# Altium PCB PCB2.PcbDoc
Units mm, origin at the board's own origin, x right, y up, seen from the top; angles counter-clockwise.
Board outline 59.94 x 60.07 mm, 4 copper layers (Top Layer, GND, VCC, Bottom Layer), stack 0.603 mm thick; 60 components, 43 nets, 219 pads, 72 vias.
Unrouted connection lines stored in the file: 1.
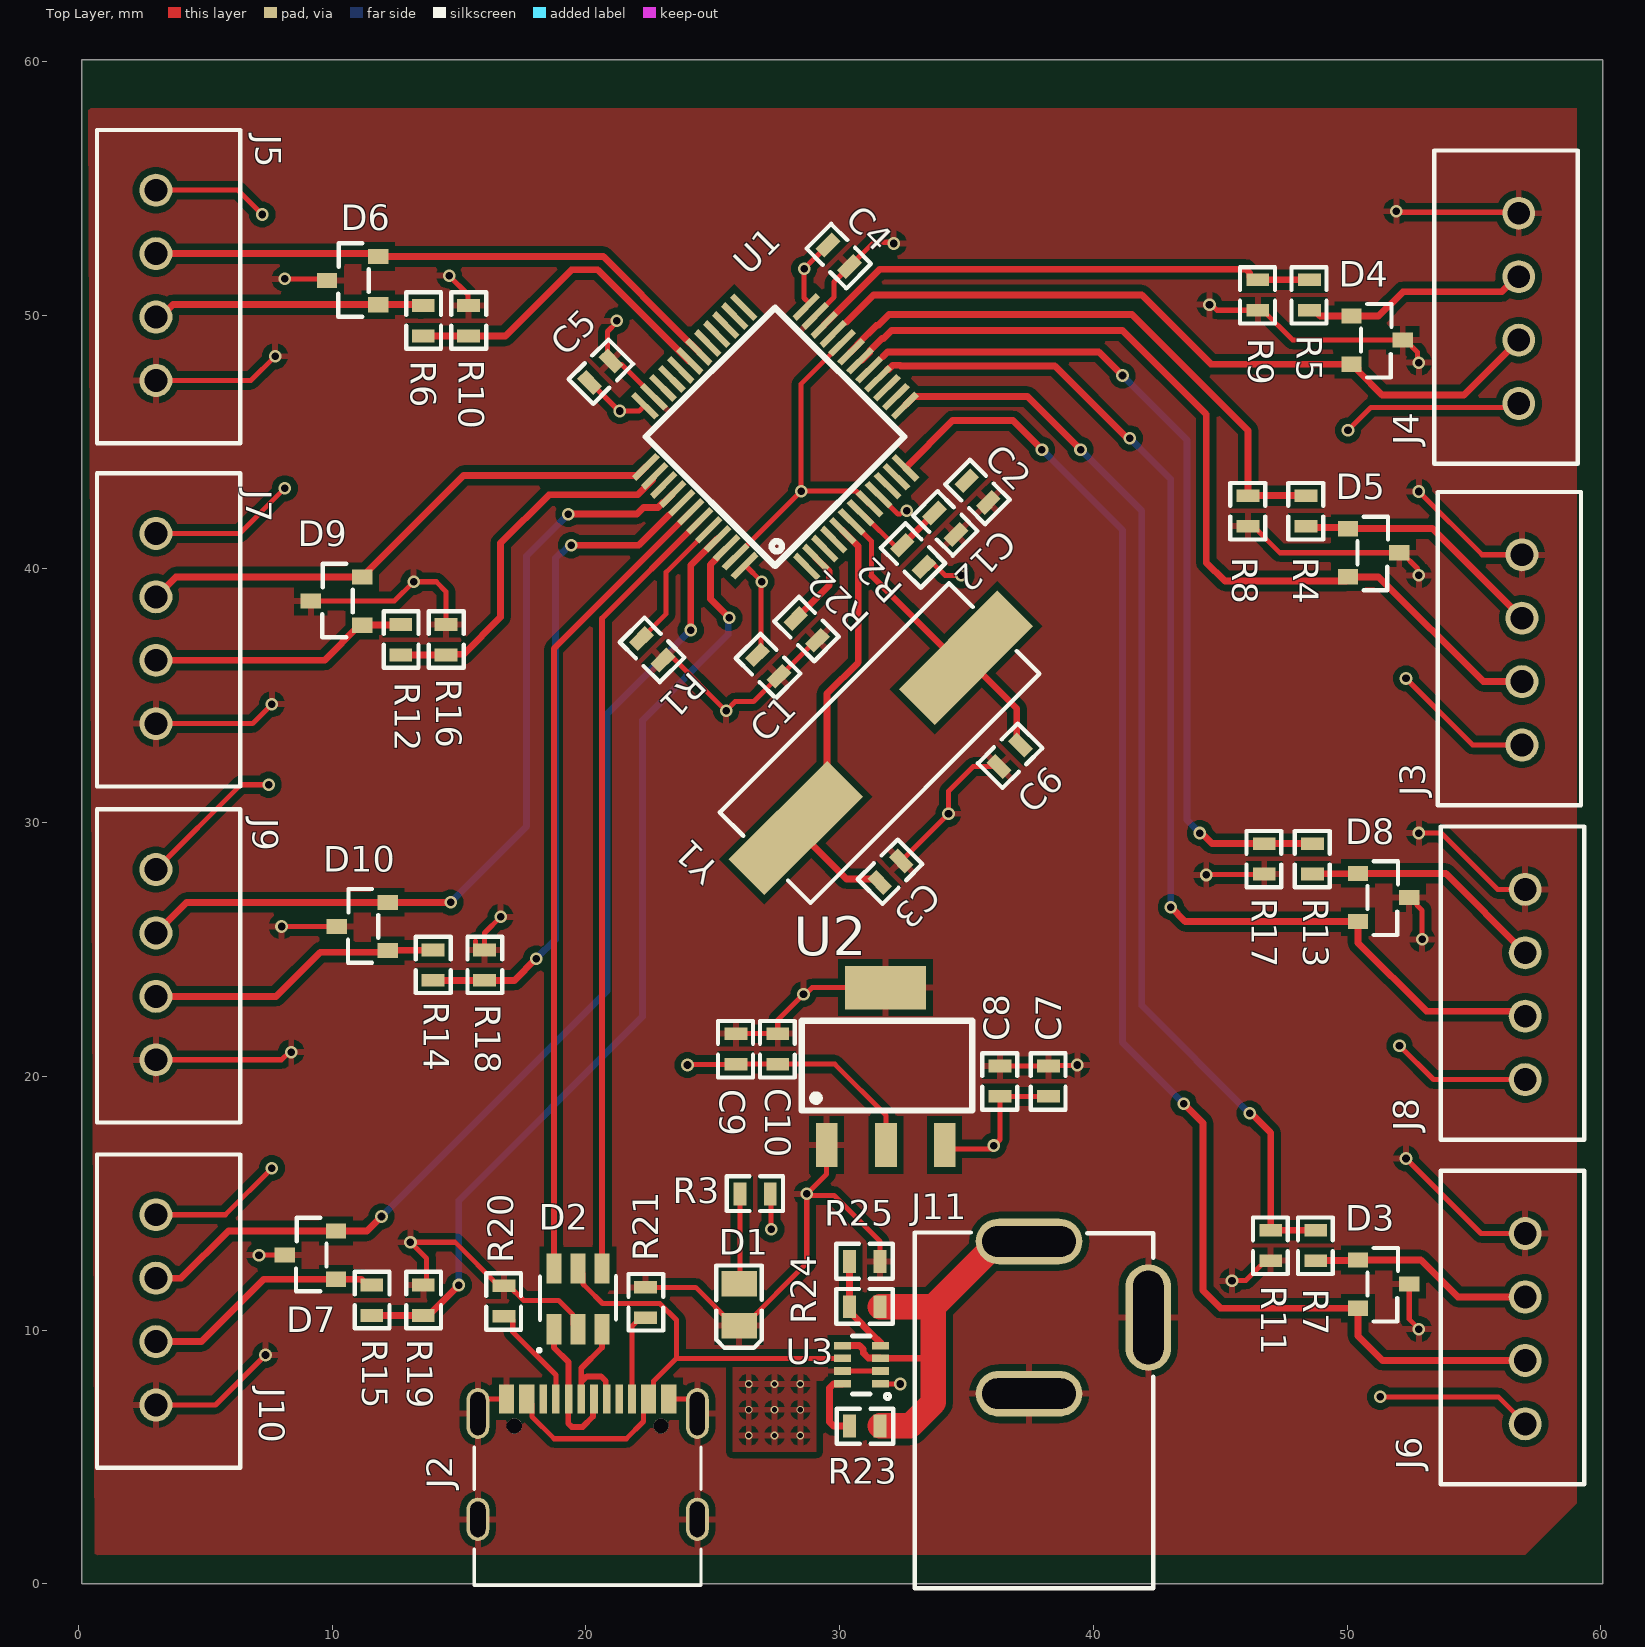
[diagram p0: Top Layer view]
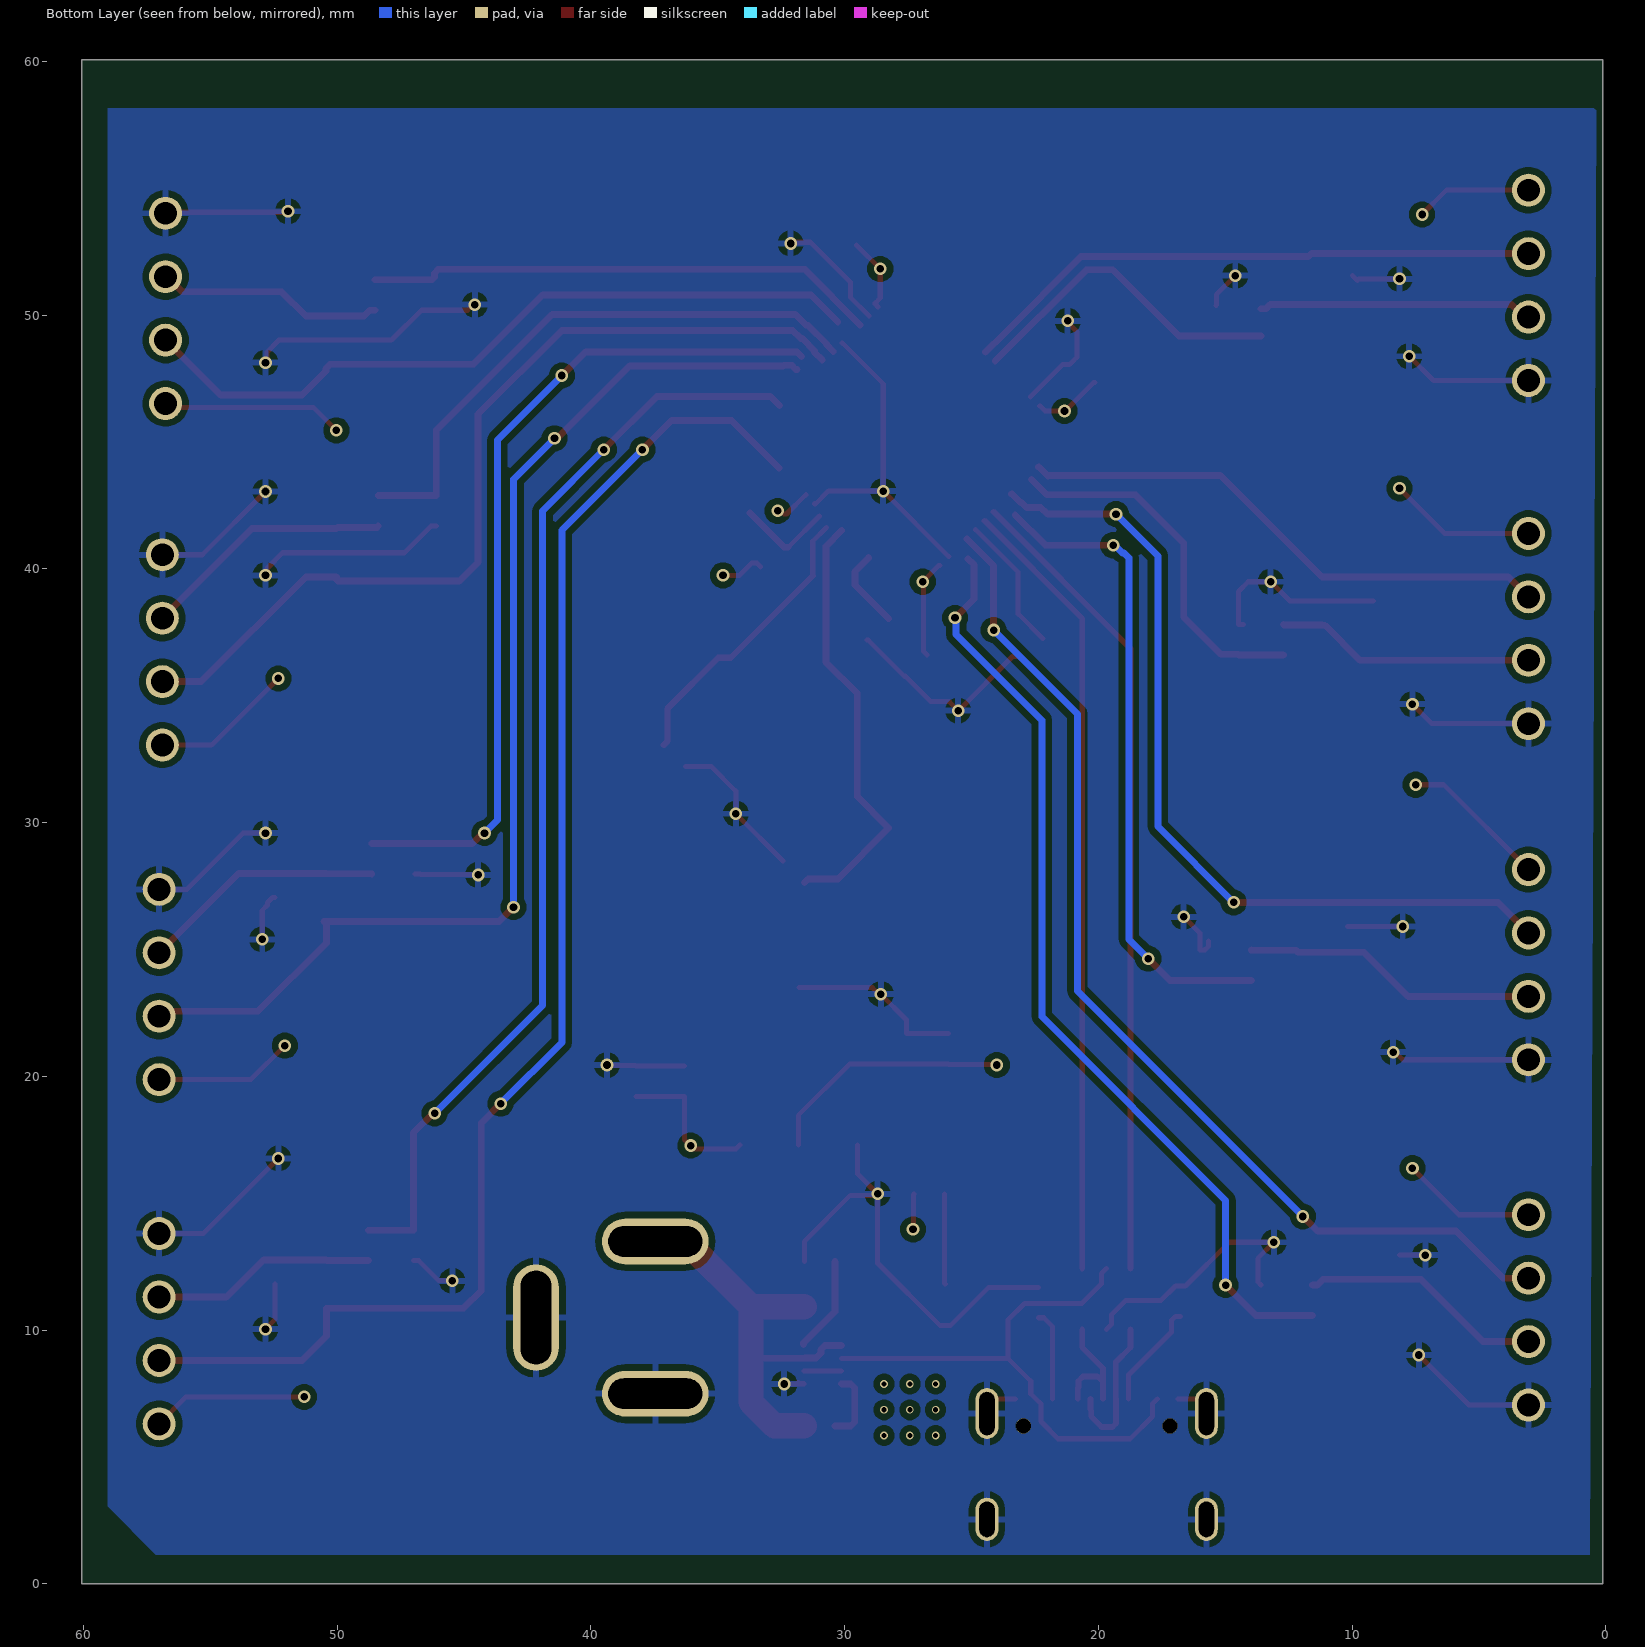
[diagram p1: Bottom Layer view, seen from below]
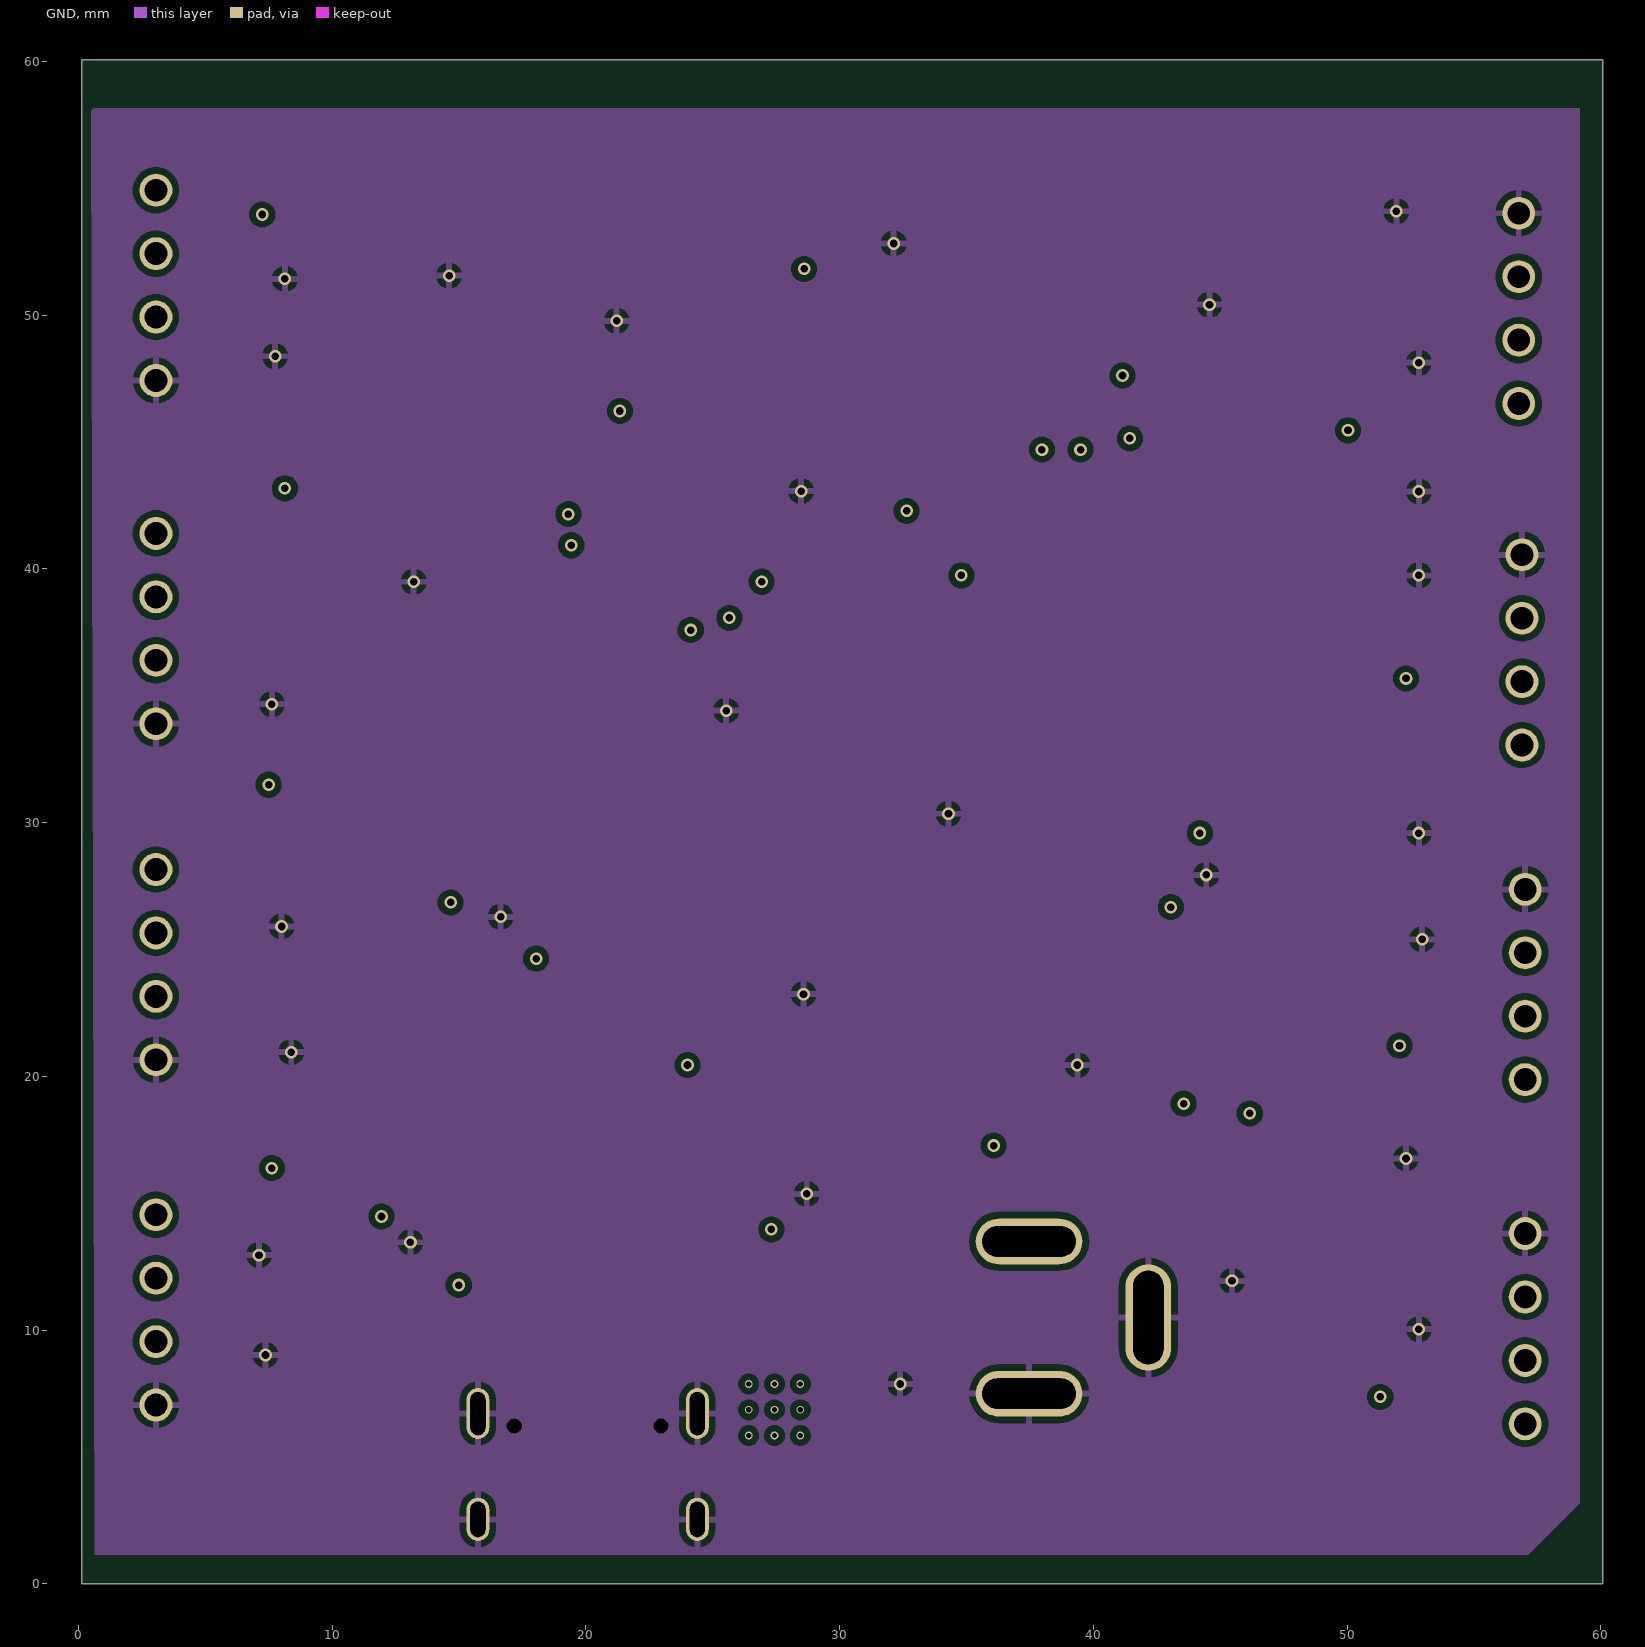
[diagram p2: GND]
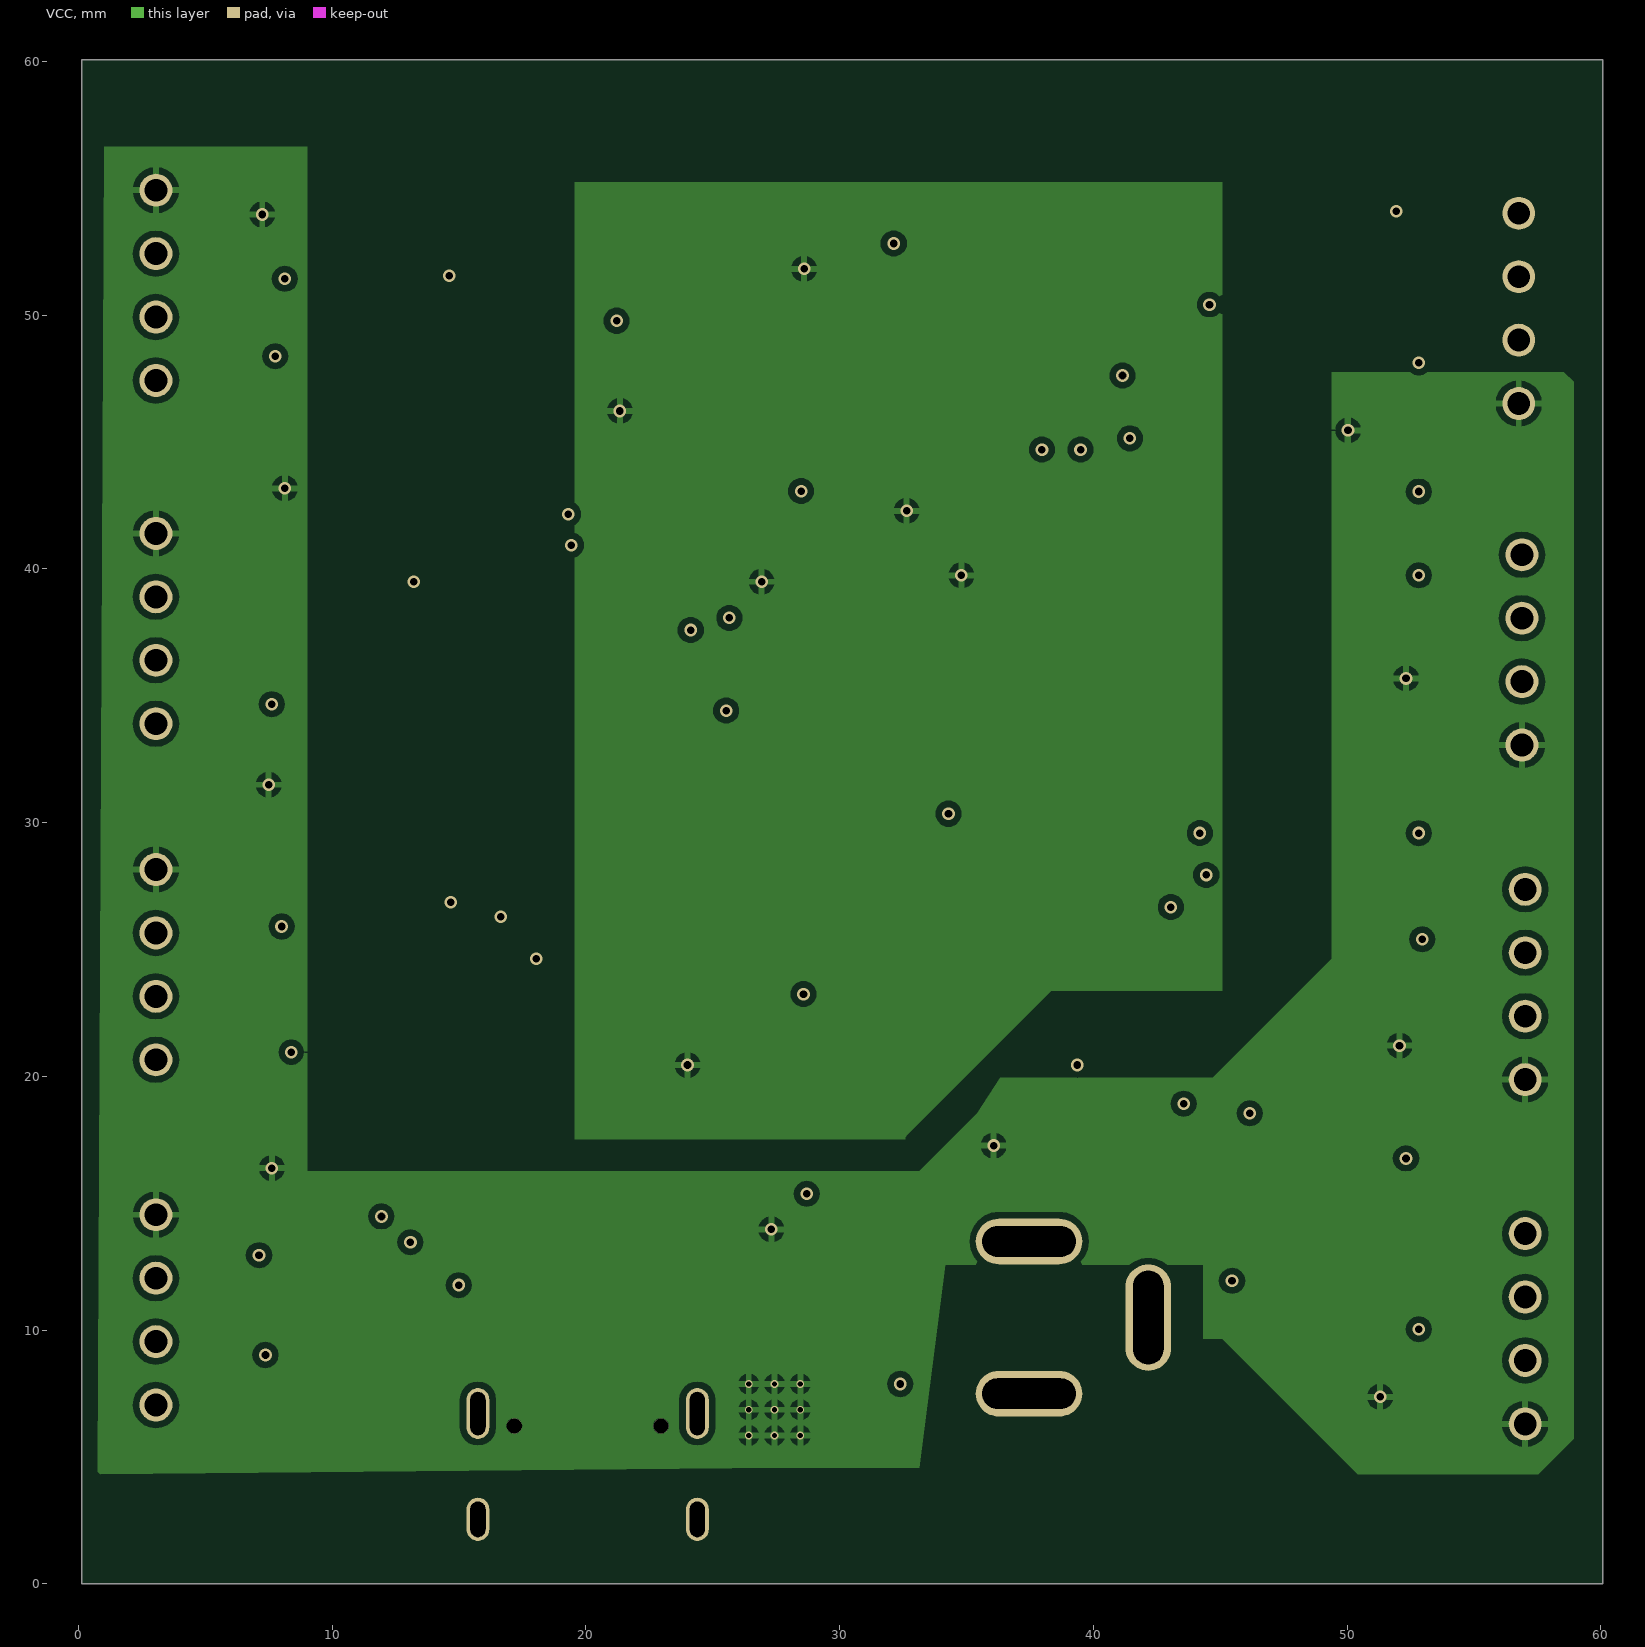
[diagram p3: VCC]
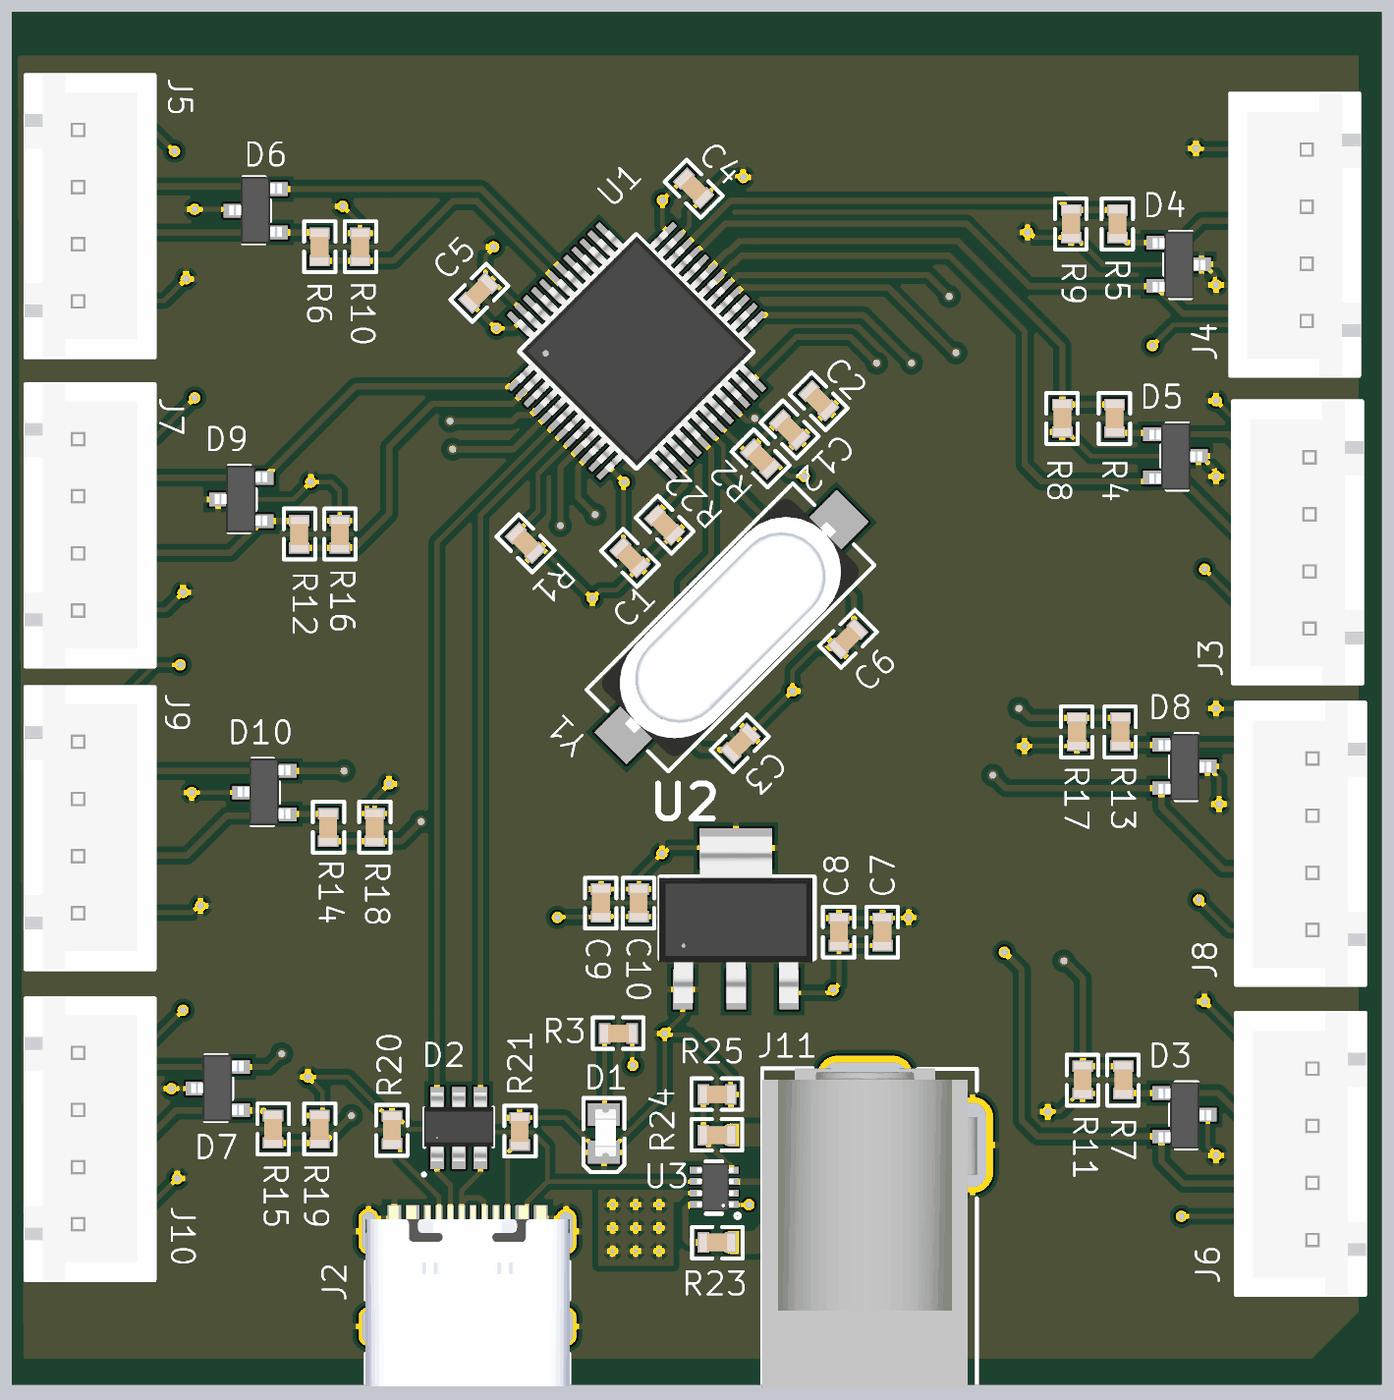
[diagram p4: 3D render of the assembled board from above, using the file's embedded part models]

## Layer stack, top to bottom
Top Solder: solder mask 0.0102, Solder Resist, Dk 3.5
Top Layer: signal copper 0.0356
Dielectric 2: prepreg 0.0711, PP-006, Dk 4.1
GND: signal copper 0.035
Dielectric 1: dielectric 0.32, FR-4, Dk 4.8
VCC: signal copper 0.035
Dielectric 3: prepreg 0.0711, PP-006, Dk 4.1
Bottom Layer: signal copper 0.0356
Bottom Solder: solder mask 0.0102, Solder Resist, Dk 3.5

## Board outline
0.127,0 60.071,0 60.071,60.071 0.127,60.071

## Design rules (kind name [scope] priority, off if disabled: settings)
Clearance [All] p1: gap=0.254 ignorepadtopadclearanceinfootprint=FALSE except(0: Arc-Hole Track-Hole SMDPad-Hole THPad-Hole Via-Hole Fill-Hole Poly-Hole Region-Hole Text-Hole; 0.127: Arc-THPad Track-THPad SMDPad-SMDPad SMDPad-THPad; 0.15: SMDPad-Text THPad-Text Via-Text; 0.2: Arc-SMDPad Track-SMDPad)
DiffPairsRouting [All] p1: maxlimit=0.254 minlimit=0.254 mostfreqgap=0.254 toplayer_minwidth=0.1 toplayer_maxwidth=1 toplayer_prefwidth=0.2 midlayer1_minwidth=0.1 midlayer1_maxwidth=1 midlayer1_prefwidth=0.2 midlayer2_minwidth=0.1 midlayer2_maxwidth=1 midlayer2_prefwidth=0.2 bottomlayer_minwidth=0.1 bottomlayer_maxwidth=1 bottomlayer_prefwidth=0.2 maxuncoupledlength=12.7
PolygonConnect [All] p1: connectstyle=Relief reliefconductorwidth=0.254 reliefentries=4 polygonreliefangle="90 Angle" airgapwidth=0.254
RoutingVias [All] p1: holewidth=0.3 width=0.5 viastyle="Through Hole" minholewidth=0.2 minwidth=0.3 maxholewidth=0.8 maxwidth=1
SolderMaskExpansion [All] p1: expansion=0.102 istentingtop=FALSE
Width [All] p1: maxlimit=2 minlimit=0.1 preferedwidth=0.3
29 further rules are at their usual default settings.

## Classes and differential pairs
differential pair VD: +VD_P -VD_N
differential pair D: +D_P -D_N

## Components (designator, comment, footprint, x,y, rotation, side; value= is the part's Value field where it differs from the comment)
C1 "0.1uF" "0603 cap" 27.178,36.195 r315 top
C2 "100nF capacitor" "0603 cap" 35.433,43.053 r315 top
C3 "22pF" "0603 cap" 32.004,28.067 r225 top
C4 "100nF capacitor" "0603 cap" 29.965,52.349 r315 top
C5 "100nF capacitor" "0603 cap" 20.567,47.777 r45 top
C6 "22pF" "0603 cap" 36.703,32.639 r45 top
C7 "10uF" "0603 cap" 38.227,19.812 r270 top
C8 "0.1uF" "0603 cap" 36.322,19.812 r270 top
C9 "10uF" "0603 cap" 25.908,21.082 r270 top
C10 "0.1uF" "0603 cap" 27.559,21.082 r270 top
C12 "0.1uF" "0603 cap" 34.163,41.783 r135 top
D1 "Led green" 0805led 26.035,10.922 r90 top
D2 "USBLC6-2SC6" SOP23-6l 19.685,11.176 r90 top
D3 "PSM712-ES" sop23 50.431,11.811 r270 top
D4 "PSM712-ES" sop23 50.177,49.022 r270 top
D5 "PSM712-ES" sop23 50.038,40.64 r270 top
D6 "PSM712-ES" sop23 11.811,51.369 r90 top
D7 "PSM712-ES" sop23 10.148,12.954 r90 top
D8 "PSM712-ES" sop23 50.431,27.051 r270 top
D9 "PSM712-ES" sop23 11.176,38.735 r90 top
D10 "PSM712-ES" sop23 12.192,25.908 r90 top
J2 "USB-C" USB-C 20.066,2.54 r0 top
J3 "Pin header" "jst 4 pin" 56.896,36.81 r90 top
J4 "Pin header" "jst 4 pin" 56.769,50.272 r90 top
J5 "Pin header" "jst 4 pin" 3.048,51.181 r270 top
J6 "Pin header" "jst 4 pin" 57.023,10.053 r90 top
J7 "Pin header" "jst 4 pin" 3.048,37.652 r270 top
J8 "Pin header" "jst 4 pin" 57.023,23.622 r90 top
J9 "Pin header" "jst 4 pin" 3.048,24.404 r270 top
J10 "Pin header" "jst 4 pin" 3.048,10.795 r270 top
J11 "DC jack" "DC jack" 39.816,10.493 r90 top
R1 "4k7" "0603 cap" 22.606,36.83 r315 top
R2 "4k7" "0603 cap" 32.893,40.513 r135 top
R3 "330R" "0603 cap" 26.67,15.367 r180 top
R4 "1k" "0603 cap" 48.387,42.291 r270 top
R5 "1k" "0603 cap" 48.514,50.8 r270 top
R6 "1k" "0603 cap" 13.589,49.784 r90 top
R7 "1k" "0603 cap" 48.768,13.335 r270 top
R8 "2k" "0603 cap" 46.101,42.291 r270 top
R9 "2k" "0603 cap" 46.482,50.8 r270 top
R10 "2k" "0603 cap" 15.367,49.784 r90 top
R11 "2k" "0603 cap" 46.99,13.335 r270 top
R12 "1k" "0603 cap" 12.7,37.211 r90 top
R13 "1k" "0603 cap" 48.641,28.575 r270 top
R14 "1k" "0603 cap" 13.97,24.384 r90 top
R15 "1k" "0603 cap" 11.557,11.176 r90 top
R16 "2k" "0603 cap" 14.478,37.211 r90 top
R17 "2k" "0603 cap" 46.736,28.575 r270 top
R18 "2k" "0603 cap" 16.002,24.384 r90 top
R19 "2k" "0603 cap" 13.589,11.176 r90 top
R20 "5k" "0603 cap" 16.764,11.141 r270 top
R21 "5k" "0603 cap" 22.352,11.084 r90 top
R22 "4k7" "0603 cap" 28.695,37.617 r135 top
R23 "1k" "0603 cap" 30.988,6.223 r0 top
R24 "1k" "0603 cap" 30.988,10.922 r180 top
R25 "1k" "0603 cap" 30.988,12.7 r180 top
U1 "UART" UART 27.806,44.856 r45 top
U2 "Linear Voltage Regulator" "linear voltage regulato" 31.877,23.495 r270 top
U3 "TPS2116DRLR" SOP8 30.861,8.636 r180 top
Y1 "8mhz" crystal 31.623,33.147 r225 top

## Footprints (in the part's own frame and the unit in brackets; to place one, negate y for a bottom-side part, rotate by r counter-clockwise, add the part's x,y. Pads: shape width x height; smd on the part's side, far side on the other; paste and mask are expansions set on the pad)
"0603 cap" [mm]
  rect 0.5x0.9 smd: 1(-0.6,0) 2(0.6,0)
  silkscreen extent -1.1,-0.7 1.13,0.68, body extent -0.8,-0.4 0.8,0.4, height 0.8
0805led [mm]
  rect 1x1.4 smd: 1(0.9,0) 2(-0.75,0)
  silkscreen extent -1.63,-0.9 1.63,0.9, body extent -0.93,-0.53 1.13,0.38, height 0.85
crystal [mm]
  rect 5.5x2 smd: 1(-4.75,0) 2(4.75,0)
  silkscreen extent -6.35,-2.55 6.43,2.5, body extent -6.2,-2.43 6.3,2.37, height 4.02
"DC jack" [mm]
  oval 1.801x4.201 hole 1.199 slot 3.701 at 90 deg: 1(-3,2.351) 2(3,2.351)
  oval 4.201x1.801 hole 1.199 slot 3.701 at 0 deg: 3(0,-2.351)
  silkscreen extent -10.67,-2.54 3.35,6.86, body extent -10.66,-2.54 3.34,6.86, height 11.09
"jst 4 pin" [mm]
  round 1.3 hole 0.9: 1(-3.75,0) 2(-1.25,0) 3(1.25,0) 4(3.75,0)
  silkscreen extent -6.12,-2.32 6.23,3.32, body extent -6.17,-2.38 6.23,3.37, height 2.95
"linear voltage regulato" [mm]
  rect 1.72x3.2 smd: 1(0,-0.07)
  rect 1.75x0.85 smd: 1(6.2,-2.39) 2(6.2,-0.05) 3(6.2,2.26)
  silkscreen extent 1.3,-3.37 4.84,3.35, body extent -0.49,-3.41 6.81,3.29, height 1.91
SOP8 [mm]
  rect 0.67x0.3 smd mask+0.06: 1(-0.74,0.75) 2(-0.74,0.25) 3(-0.74,-0.25) 4(-0.74,-0.75) 5(0.74,-0.75) 6(0.74,-0.25) 7(0.74,0.25) 8(0.74,0.75)
  silkscreen extent -1.13,-1.13 0.35,1.35, body extent -0.85,-1.05 0.75,1.05, height 0.6
sop23 [mm]
  rect 0.6x0.8 smd: 1(-0.95,0) 2(0.95,0) 3(0,2.02)
  silkscreen extent -1.43,0.38 1.48,1.58, body extent -1.43,-0.13 1.49,2.17, height 1.21
SOP23-6l [mm]
  rect 1.2x0.6 smd: 1(-1.15,0.95) 2(-1.15,0) 3(-1.15,-0.95) 4(1.25,-0.95) 5(1.25,0) 6(1.25,0.95)
  silkscreen extent -2.03,-1.5 0.95,1.58, body extent -1.4,-1.52 1.6,1.52, height 1.45
UART [mm]
  rect 0.25x1.31 smd: 1(-2.73,-4) 2(-2.23,-4) 3(-1.73,-4) 4(-1.23,-4) 5(-0.73,-4) 6(-0.23,-4) 7(0.27,-4) 8(0.77,-4) 9(1.27,-4) 10(1.77,-4) 11(2.27,-4) 12(2.77,-4) 25(2.74,4.99) 26(2.24,4.99) 27(1.74,4.99) 28(1.24,4.99) 29(0.74,4.99) 30(0.24,4.99) 31(-0.26,4.99) 32(-0.76,4.99) 33(-1.26,4.99) 34(-1.76,4.99) 35(-2.26,4.99) 36(-2.76,4.99)
  rect 1.31x0.25 smd: 13(4.49,-2.25) 14(4.49,-1.75) 15(4.49,-1.25) 16(4.49,-0.75) 17(4.49,-0.25) 18(4.49,0.25) 19(4.49,0.75) 20(4.49,1.25) 21(4.49,1.75) 22(4.49,2.25) 23(4.49,2.75) 24(4.49,3.25) 37(-4.44,3.26) 38(-4.44,2.76) 39(-4.44,2.26) 40(-4.44,1.76) 41(-4.44,1.26) 42(-4.44,0.76) 43(-4.44,0.26) 44(-4.44,-0.24) 45(-4.44,-0.74) 46(-4.44,-1.24) 47(-4.44,-1.74) 48(-4.44,-2.24)
  silkscreen extent -3.6,-3.1 3.6,4.1, body extent -4.57,-4.1 4.63,5.1, height 1.2
USB-C [mm]
  rect 0.6x1.14 smd mask+0.05: A1/B12(-3.2,4.75) A4/B9(-2.4,4.75) B1/A12(3.2,4.75) B4/A9(2.4,4.75)
  rect 0.3x1.14 smd mask+0.05: A5(-1.25,4.75) A6(-0.25,4.75) A7(0.25,4.75) A8(1.25,4.75) B5(1.75,4.75) B6(0.75,4.75) B7(-0.75,4.75) B8(-1.75,4.75)
  oval 0.9x2 hole 0.6 slot 1.7 at 90 deg: S1(-4.325,4.17) S2(4.325,4.17)
  oval 0.9x1.7 hole 0.6 slot 1.4 at 90 deg: S3(-4.325,0) S4(4.325,0)
  round 0.6 hole 0.6 unplated: ""(-2.89,3.68) ""(2.89,3.68)
  silkscreen extent -4.47,-2.6 4.47,2.85, body extent -4.47,-2.6 4.47,5.31, height 3.31

## Part data
C1 C8 C10 C12: library part "100nF capacitor", "50V 100nF X7R ±10% 0603 Multilayer Ceramic Capacitors MLCC - SMD/SMT ROHS", LCSC Part #=C235731, Manufacturer="PSA(Prosperity Dielectrics)", Mfr. Part #=FN18X104K500PBG, supplier=LCSC
C2 C4 C5: "50V 100nF X7R ±10% 0603 Multilayer Ceramic Capacitors MLCC - SMD/SMT ROHS", LCSC Part #=C235731, Manufacturer="PSA(Prosperity Dielectrics)", Mfr. Part #=FN18X104K500PBG, supplier=LCSC
C3 C6: library part "22pF capacitor", "50V 22pF C0G ±5% 0603 Multilayer Ceramic Capacitors MLCC - SMD/SMT ROHS", LCSC Part #=C525244, Manufacturer="PSA(Prosperity Dielectrics)", Mfr. Part #=FN18N220J500PSG, supplier=LCSC
C7 C9: library part "10uF capacitor", "6.3V 10uF ±10% 0603 Multilayer Ceramic Capacitors MLCC - SMD/SMT ROHS", LCSC Part #=C2836875, Manufacturer="PSA(Prosperity Dielectrics)", Mfr. Part #=FS18B106K6R3PBG, supplier=LCSC
D1: "Emerald 0805 Light Emitting Diodes (LED) ROHS", LCSC Part #=C434432, Manufacturer="Yongyu Photoelectric", Mfr. Part #=SZYY0805G, supplier=LCSC
D2: "5A 17V 6V Unidirectional 5.25V SOT-23-6 Electrostatic and Surge Protection (TVS/ESD) ROHS", LCSC Part #=C7519, Manufacturer=STMicroelectronics, Mfr. Part #=USBLC6-2SC6, supplier=LCSC
D3 D4 D5 D6 D7 D8 D9 D10: "17A 350W Bi-Directional SOT-23 Electrostatic and Surge Protection (TVS/ESD) ROHS", LCSC Part #=C5180294, Manufacturer=ElecSuper, Mfr. Part #=PSM712-ES, supplier=LCSC
J2: "5A 1 16P Female Type-C SMD USB Connectors ROHS", LCSC Part #=C165948, Manufacturer="Korean Hroparts Elec", Mfr. Part #=TYPE-C-31-M-12, supplier=LCSC
J3 J4 J5 J6 J7 J8 J9 J10: "1x4P 4P XH 1 2.5mm 4 Phosphor bronze Plugin,P=2.5mm Wire To Board Connector ROHS", LCSC Part #=C37815, Manufacturer=BOOMELE, Mfr. Part #=XH-4A, supplier=LCSC
J11: "Panel Mounting DC Power Receptacle 260℃ Brass -20℃~+70℃ 2mm 6.2mm 2.5A 24V Plugin DC Power Connector ROHS", LCSC Part #=C319099, Manufacturer="XKB Connection", Mfr. Part #=DC-005-2.5A-2.0, supplier=LCSC
R1 R2 R22: library part "4k7 resistor", "100mW Thick Film Resistors 75V ±100ppm/℃ ±5% 4.7kΩ 0603 Chip Resistor - Surface Mount ROHS", LCSC Part #=C25999, Manufacturer="UNI-ROYAL(Uniroyal Elec)", Mfr. Part #=0603WAJ0472T5E, supplier=LCSC
R3: "100mW Thick Film Resistors 75V ±100ppm/℃ ±1% 330Ω 0603 Chip Resistor - Surface Mount ROHS", LCSC Part #=C23138, Manufacturer="UNI-ROYAL(Uniroyal Elec)", Mfr. Part #=0603WAF3300T5E, supplier=LCSC
R4 R5 R6 R7 R12 R13 R14 R15 R23 R24 R25: library part "1k resistor", "100mW Thick Film Resistors 75V ±100ppm/℃ ±1% 1kΩ 0603 Chip Resistor - Surface Mount ROHS", LCSC Part #=C21190, Manufacturer="UNI-ROYAL(Uniroyal Elec)", Mfr. Part #=0603WAF1001T5E, supplier=LCSC
R8 R9 R10 R11 R16 R17 R18 R19: library part "2k resistor", "100mW Thick Film Resistors 75V ±100ppm/℃ ±1% 2kΩ 0603 Chip Resistor - Surface Mount ROHS", LCSC Part #=C22975, Manufacturer="UNI-ROYAL(Uniroyal Elec)", Mfr. Part #=0603WAF2001T5E, supplier=LCSC
R20 R21: "100mW Thick Film Resistors 75V ±100ppm/℃ ±1% 330Ω 0603 Chip Resistor - Surface Mount ROHS", LCSC Part #=C23186, Manufacturer="UNI-ROYAL(Uniroyal Elec)", Mfr. Part #=0603WAF5101T5E, supplier=LCSC
U1: "LQFP-48(7x7) USB ICs ROHS", Manufacturer="WCH(Jiangsu Qin Heng)", Manufacturer Part Number=CH348Q, Supplier Part Number=C2979161, supplier=LCSC
U2: "SOT-223 Linear Voltage Regulators (LDO) ROHS", Manufacturer=IDCHIP, Manufacturer Part Number=1117-5, Supplier Part Number=C5125089, supplier=LCSC
U3: "1.6V~5.5V 42mΩ 2.5A 1 SOT-583 Power Distribution Switches ROHS", LCSC Part #=C3235557, Manufacturer="Texas Instruments", Mfr. Part #=TPS2116DRLR, supplier=LCSC
Y1: library part "Crystal 8mhz", "8MHz 贴片晶振 20pF ±20ppm ±20ppm HC-49S-SMD Crystals ROHS", LCSC Part #=C2835983, Manufacturer=KYX, Mfr. Part #=KBD080002020, supplier=LCSC

## Via types
v1: diameter 0.5, hole 0.3, Top Layer to Bottom Layer, 47 vias
v2: diameter 0.5, hole 0.3, Top Layer to Bottom Layer, tented both sides, 16 vias
v3: diameter 0.3, hole 0.2, Top Layer to Bottom Layer, 9 vias

## Nets (pads, with @x,y where several pads share a name; then routed paths per layer and width w, separated by ;. In a path a pad name is that pad's centre, name@x,y a point inside that pad or via, vN(x,y) a via of type N, cw(c..) or ccw(c..) an arc to the next point about the centre after c; other vN are vias at no path point)
3V3: C1.1 C2.1 C4.1 C5.1 C9.2 C10.2 R2.1 U1.9 U1.24 U1.36 U1.48 U2.2 | length 22.3
  Top Layer w0.2: C5.1 20.177,47.353 21.302,46.228 22.095,46.228 22.3,46.433 U1.36 ; v1(24.003,20.447) 24.021,20.465 25.89,20.465 C9.2 C10.2 29.81,20.482 31.827,18.465 U2.2 ; U1.48 26.252,40.134 26.287,40.134 v1(26.924,39.497) 26.895,39.468 26.895,36.761 C1.1 ; U1.24 28.799,50.445 28.799,50.48 28.599,50.68 v1(28.599,51.831) C4.1 ; U1.9 32.294,42.164 32.385,42.164 ; R2.1 33.459,40.23 33.671,40.23 34.15,39.751 v1(34.798,39.751)
  other v1: 21.336,46.228
  other v2: 32.639,42.291
+5: C7.2 C8.2 J3.1 J4.1 J5.1 J6.1 J7.1 J8.1 J9.1 J10.1 R3.1 U2.3 U3.2 U3.7 | length 55
  Top Layer w0.2: J10.1 5.782,14.545 v1(7.62,16.383) ; J9.1 6.39,31.496 v1(7.493,31.496) ; J7.1 6.35,41.402 v1(8.128,43.18) ; J5.1 6.283,54.931 v1(7.239,53.975) ; R3.1 27.287,15.349 27.287,13.988 v1(27.305,13.97) ; U3.7 U3.2 ; U2.3 34.287,17.145 35.96,17.145 36.322,17.507 C8.2 C7.2 ; v1(50.038,45.466) 50.946,46.374 56.621,46.374 J4.1 ; v1(51.308,7.366) 55.96,7.366 J6.1 ; v1(52.07,21.209) 53.407,19.872 J8.1 ; v1(52.324,35.687) 54.951,33.06 J3.1
  other v1: 36.068,17.272
  other v3: 26.416,5.842 27.432,5.842 28.448,5.842 26.416,6.858 27.432,6.858 28.448,6.858 26.416,7.874 27.432,7.874 28.448,7.874
D_N: D2.1 J2.A7 J2.B7 | length 5.9
  Top Layer w0.23: D2.1 18.735,9.311 19.316,8.73 J2.B7 19.304,7.278 19.304,6.319 19.439,6.184 19.875,6.184 20.281,6.59 20.281,6.835 20.316,6.87 J2.A7
D_P: D2.3 J2.A6 J2.B6 | length 4.9
  Top Layer w0.23: J2.A6 19.816,7.955 ; D2.3 20.635,9.311 19.816,8.492 19.816,7.955 ; J2.B6 20.816,7.71 20.781,7.745 20.781,7.99 20.596,8.175 20.036,8.175 19.816,7.955
GND: C1.2 C2.2 C3.1 C4.2 C5.2 C6.1 C7.1 C8.1 C9.1 C10.1 C12.1 D1.2 D2.2 D3.3 D4.3 D5.3 D6.3 D7.3 D8.3 D9.3 D10.3 J2.A1/B12 J2.B1/A12 J2.S1 J2.S2 J2.S3 J2.S4 J3.4 J4.4 J5.4 J6.4 J7.4 J8.4 J9.4 J10.4 J11.1 J11.3 R1.2 R8.2 R9.2 R10.2 R11.2 R16.2 R17.2 R18.2 R19.2 R20.1 R21.2 R22.1 R25.1 U1.8 U1.20 U1.23 U1.35 U1.47 U2.1 U3.1 | length 160.6
  Top Layer w0.2: J10.4 5.394,7.045 v1(7.366,9.017) ; J9.4 8,20.654 8.301,20.955 v1(8.382,20.955) ; J7.4 6.851,33.902 v1(7.62,34.671) ; J5.4 6.791,47.431 v1(7.747,48.387) ; v1(7.112,12.954) D7.3 ; v1(8.001,25.908) D10.3 ; v1(8.128,51.435) 9.725,51.435 D6.3 D6.3@9.984,51.562 ; D9.3 12.446,38.735 v1(13.208,39.497) 14.097,39.497 14.478,39.116 R16.2 R16.2@14.278,37.811 ; R19.2 13.716,11.903 13.716,12.827 v1(13.081,13.462) 14.843,13.462 16.564,11.741 R20.1 16.964,11.741 17.534,11.171 18.915,11.171 19.485,10.6 19.485,10.226 D2.2 ; v1(14.605,51.562) 15.35,50.817 15.35,50.401 R10.2 ; 15.652,25.334 15.652,25.134 15.802,24.984 R18.2 16.002,25.654 v1(16.637,26.289) ; J2.S1 15.741,6.967 16.064,7.29 J2.A1/B12 ; v1(21.209,49.784) 21.209,49.724 20.85,49.365 20.85,48.343 C5.2 21.133,48.06 21.406,48.06 U1.35 ; R21.2 24.323,11.684 25.835,10.172 D1.2 26.235,10.172 28.702,12.639 v1(28.702,15.367) ; R1.2@23.078,36.485 23.141,36.547 23.384,36.547 v1@25.514,34.417 ; J2.B1/A12 24.068,7.29 24.391,6.967 J2.S2 ; v1(25.527,34.417) 25.879,34.769 26.6,34.769 C1.2 27.65,35.771 29.072,37.193 R22.1 ; U1.47 v1(28.481,43.07) ; C9.1 C10.1 27.559,22.225 v1(28.575,23.241) 28.656,23.241 28.91,23.495 U2.1@31.807,23.495 ; U1.23 29.777,50.715 29.777,51.312 C4.2 31.346,52.881 32.082,52.881 v1(32.131,52.832) ; U2.1@29.487,17.295 29.487,16.152 v1(28.702,15.367) ; U1.20 28.481,47.298 v1(28.481,43.07) ; U1.8 31.144,42.572 30.646,43.07 v1(28.481,43.07) ; R25.1 31.588,13.497 29.775,15.31 28.759,15.31 v1(28.702,15.367) ; U3.1@31.836,7.936 31.786,7.886 U3.1 31.607,7.88 32.379,7.88 v1(32.385,7.874) ; C3.1 v1(34.29,30.353) 34.29,31.242 35.263,32.215 C6.1 ; C8.1 C7.1 38.245,20.429 39.352,20.429 v1(39.37,20.447) ; v1(44.45,27.94) 44.468,27.958 46.718,27.958 R17.2 R17.2@46.936,27.975 ; v1(44.577,50.419) 44.658,50.419 44.877,50.2 R9.2 46.682,50.2 47.86,49.022 D4.3 52.297,49.022 52.775,48.544 52.775,48.19 v1(52.832,48.133) ; v1(45.466,11.938) 45.489,11.961 46.016,11.961 46.79,12.735 R11.2 ; R8.2 46.301,41.691 47.352,40.64 D5.3 52.158,40.64 52.775,40.023 52.775,39.808 v1(52.832,39.751) ; v1(51.943,54.102) 51.983,54.062 56.729,54.062 J4.4 ; v1(52.324,16.764) 55.285,13.803 J6.4 ; D3.3 52.451,10.43 52.832,10.049 v1(52.832,10.033) ; D8.3 52.551,27.051 52.751,26.851 52.751,26.751 52.959,26.543 v1(52.959,25.4) ; v1(52.832,29.591) 53.71,29.591 55.929,27.372 J8.4 ; v1(52.832,43.053) 55.325,40.56 J3.4
NetC3_2: C3.2 U1.5 Y1.2 | length 17.2
  Top Layer w0.27: U1.5 30.734,40.896 30.734,36.322 29.502,35.09 29.502,31.026 Y1.2 30.268,27.784 31.438,27.784 C3.2
NetC6_2: C6.2 U1.6 Y1.1 | length 11.5
  Top Layer w0.2: U1.6@30.717,41.639 31.258,41.099 31.258,39.735
  Top Layer w0.25: 31.258,39.735 34.487,36.506 Y1.1 36.986,34.502 36.986,33.205 C6.2
NetD1_1: D1.1 R3.2 | length 3.6
  Top Layer w0.2: D1.1 26.07,11.857 R3.2
NetJ2_A5: J2.A5 R20.2 | length 4.2
  Top Layer w0.2: R20.2 16.964,10.541 17.114,10.391 17.114,9.927 18.816,8.225 J2.A5
NetJ2_B5: J2.B5 R21.1 | length 3.5
  Top Layer w0.2: J2.B5 21.816,10.148 22.152,10.484 R21.1
NetR1_1: R1.1 U1.44 | length 5.4
  Top Layer w0.2: R1.1 23.162,38.235 23.162,39.872 U1.44
NetR22_2: R22.2 U1.2 | length 3.2
  Top Layer w0.27: R22.2 29.591,39.361 29.591,39.903 29.058,40.436 U1.2
NetR23_1: R23.1 U3.8 | length 2.8
  Top Layer w0.27: U3.8 30.106,7.871 29.761,7.871 29.603,7.713 29.603,6.381 29.761,6.223 R23.1
PR1: R24.2 R25.2 U3.4 | length 3.8
  Top Layer w0.27: R25.2 R24.2 30.388,10.722 31.458,9.652 31.465,9.652 31.623,9.494 U3.4@31.623,9.425
reset: C12.2 R2.2 U1.7 | length 3.8
  Top Layer w0.2: U1.7@30.994,42.09 R2.2@32.226,40.857
  Top Layer w0.27: R2.2@32.226,40.857 32.389,40.857 R2.2 C12.2
RXD0: R6.1 R10.1 U1.31 | length 13
  Top Layer w0.27: R6.1 16.82,49.184 19.431,51.795 20.465,51.795 U1.31@24.065,48.195
RXD0b: D6.1 J5.3 R6.2 | length 10.8
  Top Layer w0.27: J5.3 3.233,49.931 3.721,50.419 13.227,50.419 13.389,50.257 R6.2@13.589,50.257
RXD1: R7.1 R11.1 U1.13 | length 43.7
  Top Layer w0.27: U1.13 32.933,46.8 37.401,46.8 v2(39.497,44.704) ; v2@46.101,18.542 v2(46.164,18.542) 46.228,18.542 46.99,17.78 R11.1 R7.1
  Bottom Layer w0.27: v2(39.497,44.704) 41.91,42.291 41.91,22.796 v2(46.164,18.542)
RXD1b: D3.1 J6.3 R7.2 | length 8.9
  Top Layer w0.27: R7.2 48.781,12.748 50.418,12.748 D3.1 52.909,12.761 54.367,11.303 J6.3
RXD2: R5.1 R9.1 U1.22 | length 20.3
  Top Layer w0.27: U1.22 31.584,51.816 46.009,51.816 46.167,51.658 46.167,51.515 46.282,51.4 R5.1
RXD2b: D4.1 J4.3 R5.2 | length 9
  Top Layer w0.27: R5.2 48.714,50.2 48.942,49.972 D4.1 51.242,49.972 52.197,50.927 56.096,50.927 56.691,51.522 J4.3
RXD3: R4.1 R8.1 U1.19 | length 23
  Top Layer w0.27: U1.19 30.451,48.575 30.723,48.848 30.723,48.879 31.45,49.605 31.509,49.605 31.942,50.038 41.529,50.038 46.101,45.466 R8.1 R4.1
RXD3b: D5.1 J3.3 R4.2 | length 10
  Top Layer w0.27: R4.2 48.438,41.64 49.988,41.64 D5.1 53.366,41.59 J3.3
RXD4: R14.1 R18.1 U1.41 | length 25.7
  Top Layer w0.27: R14.1 R18.1 17.18,23.784 v2(18.034,24.638) ; v2(19.419,40.937) 22.083,40.937 23.277,42.132
  Bottom Layer w0.27: v2(18.034,24.638) 18.796,25.4 18.796,40.443 18.987,40.633 19.052,40.633 19.356,40.937 v2(19.419,40.937)
RXD4b: D10.1 J9.3 R14.2 | length 11.7
  Top Layer w0.27: J9.3 7.787,23.154 9.525,24.892 12.126,24.892 D10.1 12.205,24.971 13.957,24.971 R14.2
RXD5: R15.1 R19.1 U1.46 | length 37.4
  Top Layer w0.27: R15.1 R19.1 13.789,10.576 v2(14.986,11.773) ; U1.46@25.135,40.397 24.908,40.17 24.908,38.815 v2(25.65,38.073)
  Bottom Layer w0.27: v2(14.986,11.773) 14.986,15.113 22.225,22.352 22.225,34.036 25.607,37.418 25.607,38.031 v2(25.65,38.073)
RXD5b: D7.1 J10.3 R15.2 | length 9.6
  Top Layer w0.27: J10.3 4.846,9.545 7.305,12.004 D7.1 11.129,12.004 11.357,11.776 R15.2
RXD6: R13.1 R17.1 U1.17 | length 33.8
  Top Layer w0.27: 31.709,48.382 31.884,48.557 40.216,48.557 v2(41.148,47.625) ; v2(44.196,29.591) 44.258,29.591 44.674,29.175 R13.1
  Bottom Layer w0.27: v2(41.148,47.625) 43.688,45.085 43.688,30.099 v2(44.196,29.591)
RXD6b: D8.1 J8.3 R13.2 | length 9.7
  Top Layer w0.27: R13.2 48.654,27.988 50.418,27.988 D8.1 53.894,28.001 J8.3
RXD7: R12.1 R16.1 U1.38 | length 14.5
  Top Layer w0.27: R12.1 R16.1 14.505,36.638 15.175,36.638 16.637,38.1 16.637,41.021 18.542,42.926 22.03,42.926 U1.38@22.635,43.532
RXD7b: D9.1 J7.3 R12.2 | length 10.2
  Top Layer w0.27: J7.3 9.693,36.402 11.076,37.785 D9.1 11.189,37.798 12.687,37.798 R12.2
TXD0: D6.2 J5.2 U1.30 | length 23
  Top Layer w0.27: J5.2 11.599,52.431 11.711,52.319 D6.2 20.682,52.319 23.749,49.252 U1.30
TXD1: D3.2 J6.2 U1.12 | length 56.9
  Top Layer w0.27: U1.12 34.454,45.847 36.83,45.847 v2(37.973,44.704) ; v1(43.561,18.923) 44.323,18.161 44.323,11.557 45.019,10.861 D3.2 50.431,9.767 51.395,8.803 J6.2
  Bottom Layer w0.27: v2(37.973,44.704) 41.148,41.529 41.148,21.336 v1(43.561,18.923)
TXD2: D4.2 J4.2 U1.21 | length 29.5
  Top Layer w0.27: 30.271,49.739 31.332,50.8 41.91,50.8 44.638,48.072 50.277,48.072 50.442,47.907 50.442,47.807 51.386,46.863 54.61,46.863 J4.2
TXD3: D5.2 J3.2 U1.18 | length 35.9
  Top Layer w0.27: U1.18@30.883,48.238 31.185,48.54 31.185,48.6 31.667,49.081 31.726,49.081 32.048,49.403 41.148,49.403 44.45,46.101 44.45,40.259 45.184,39.525 49.973,39.525 D5.2@50.138,39.69 ; D5.2 51.242,39.69 55.372,35.56 J3.2
TXD4: D10.2 J9.2 U1.40 | length 33.8
  Top Layer w0.27: J9.2 4.252,26.858 D10.2 v2(14.666,26.858) ; v2(19.304,42.164) 22.009,42.164 22.273,42.428 22.833,42.428 23.014,42.609 23.056,42.609 23.408,42.961 U1.40
  Bottom Layer w0.27: v2(14.666,26.858) 17.653,29.845 17.653,40.513 v2(19.304,42.164)
TXD5: D7.2 J10.2 U1.45 | length 42.1
  Top Layer w0.27: J10.2 4.044,12.045 5.903,13.904 D7.2 11.364,13.904 v2(11.938,14.478) ; v2(24.13,37.592) 24.13,40.133 U1.45
  Bottom Layer w0.27: v2(11.938,14.478) 20.828,23.368 20.828,34.29 v2(24.13,37.592)
TXD6: D8.2 J8.2 U1.16 | length 46.3
  Top Layer w0.27: U1.16@31.886,47.861 31.929,47.861 32.101,48.033 32.378,48.033 32.406,48.006 38.481,48.006 v2@41.402,45.085 ; v2(43.053,26.67) 43.622,26.101 D8.2@50.531,26.101 ; D8.2 50.431,25.261 53.123,22.569 56.826,22.569 J8.2
  Bottom Layer w0.27: v2(41.44,45.15) 43.053,43.537 v2(43.053,26.67)
TXD7: D9.2 J7.2 U1.37 | length 21.5
  Top Layer w0.27: J7.2 3.831,39.685 D9.2 15.179,43.688 21.96,43.688 21.987,43.661 22.347,44.022 U1.37
Vbus: D2.5 J2.A4/B9 J2.B4/A9 U3.6 | length 21.9
  Top Layer w0.2: J2.A4/B9 17.866,7.09 17.866,6.596 18.747,5.715 21.59,5.715 22.266,6.391 22.266,7.09 J2.B4/A9 22.666,7.49 22.666,7.984 23.568,8.886 ; D2.5 19.885,12.226 19.885,11.815 20.035,11.665 20.652,11.047 22.913,11.047 23.568,10.393 23.568,8.886 ; U3.6 23.568,8.886
VD_N: D2.6 U1.42 | length 32.1
  Top Layer w0.23: D2.6 18.735,36.86 U1.42
VD_P: D2.4 U1.43 | length 31.1
  Top Layer w0.23: D2.4 20.635,38.052 U1.43
Vin: J11.2 R23.2 R24.1 U3.3 U3.5 | length 17.3
  Top Layer w0.27: U3.5 30.773,9.386 30.931,9.228 30.931,9.097 31.127,8.901 31.586,8.901 U3.3 33.226,8.886 33.694,9.354
  Top Layer w1: R23.2 32.766,6.223 33.694,7.151 33.694,9.354 33.694,10.922 ; R24.1 33.694,10.922 ; J11.2 36.265,13.493 33.694,10.922
pads on no net: J2. J2.A8 J2.B8 U1.1 U1.3 U1.4 U1.10 U1.11 U1.14 U1.15 U1.25 U1.26 U1.27 U1.28 U1.29 U1.32 U1.33 U1.34 U1.39

## Polygon pours and split planes (outlines as drawn)
3V3 on VCC "3V3_L03_P000" (solid, pour order 0): 19.558,17.526 32.579,17.526 cw(c32.766,17.526) 32.634,17.658 38.344,23.368 45.085,23.368 45.085,55.245 19.558,55.245
+5 on VCC "VCC-+5" (solid, pour order 7): 27.813,4.572 33.147,4.572 34.163,12.573 44.323,12.573 44.323,9.652 45.085,9.652 50.419,4.318 57.531,4.318 58.928,5.715 58.928,47.371 58.547,47.752 49.403,47.752 49.403,24.638 44.704,19.939 36.322,19.939 35.433,18.542 33.147,16.256 9.017,16.256 9.017,56.642 1.016,56.642 0.762,4.318
GND on Top Layer "GND_L01_P009" (solid, pour order 9): 0.381,58.166 59.055,58.166 59.055,3.175 57.023,1.143 0.762,1.143 0.635,1.016
+5 on Top Layer "+5_L01_P008" (solid, pour order 8): 30.48,8.636 30.48,8.001 29.083,8.001 29.083,5.207 25.781,5.207 25.781,8.636
GND on GND "GND_L02_P005" (solid, pour order 5): 0.508,58.166 59.182,58.166 59.182,3.175 57.15,1.143 1.27,1.143 0.635,1.143
GND on Bottom Layer "GND_L04_P010" (solid, pour order 10): 0.381,58.166 59.055,58.166 59.055,3.048 57.15,1.143 57.023,1.143 0.635,1.143